# Altium PCB receiver_car_2S_A.PcbDoc
Units mil, origin at the board's own origin, x right, y up, seen from the top; angles counter-clockwise.
Board outline 1675 x 1230 mil, 2 copper layers (Top Layer, Bottom Layer); 48 components, 48 nets, 199 pads, 61 vias.
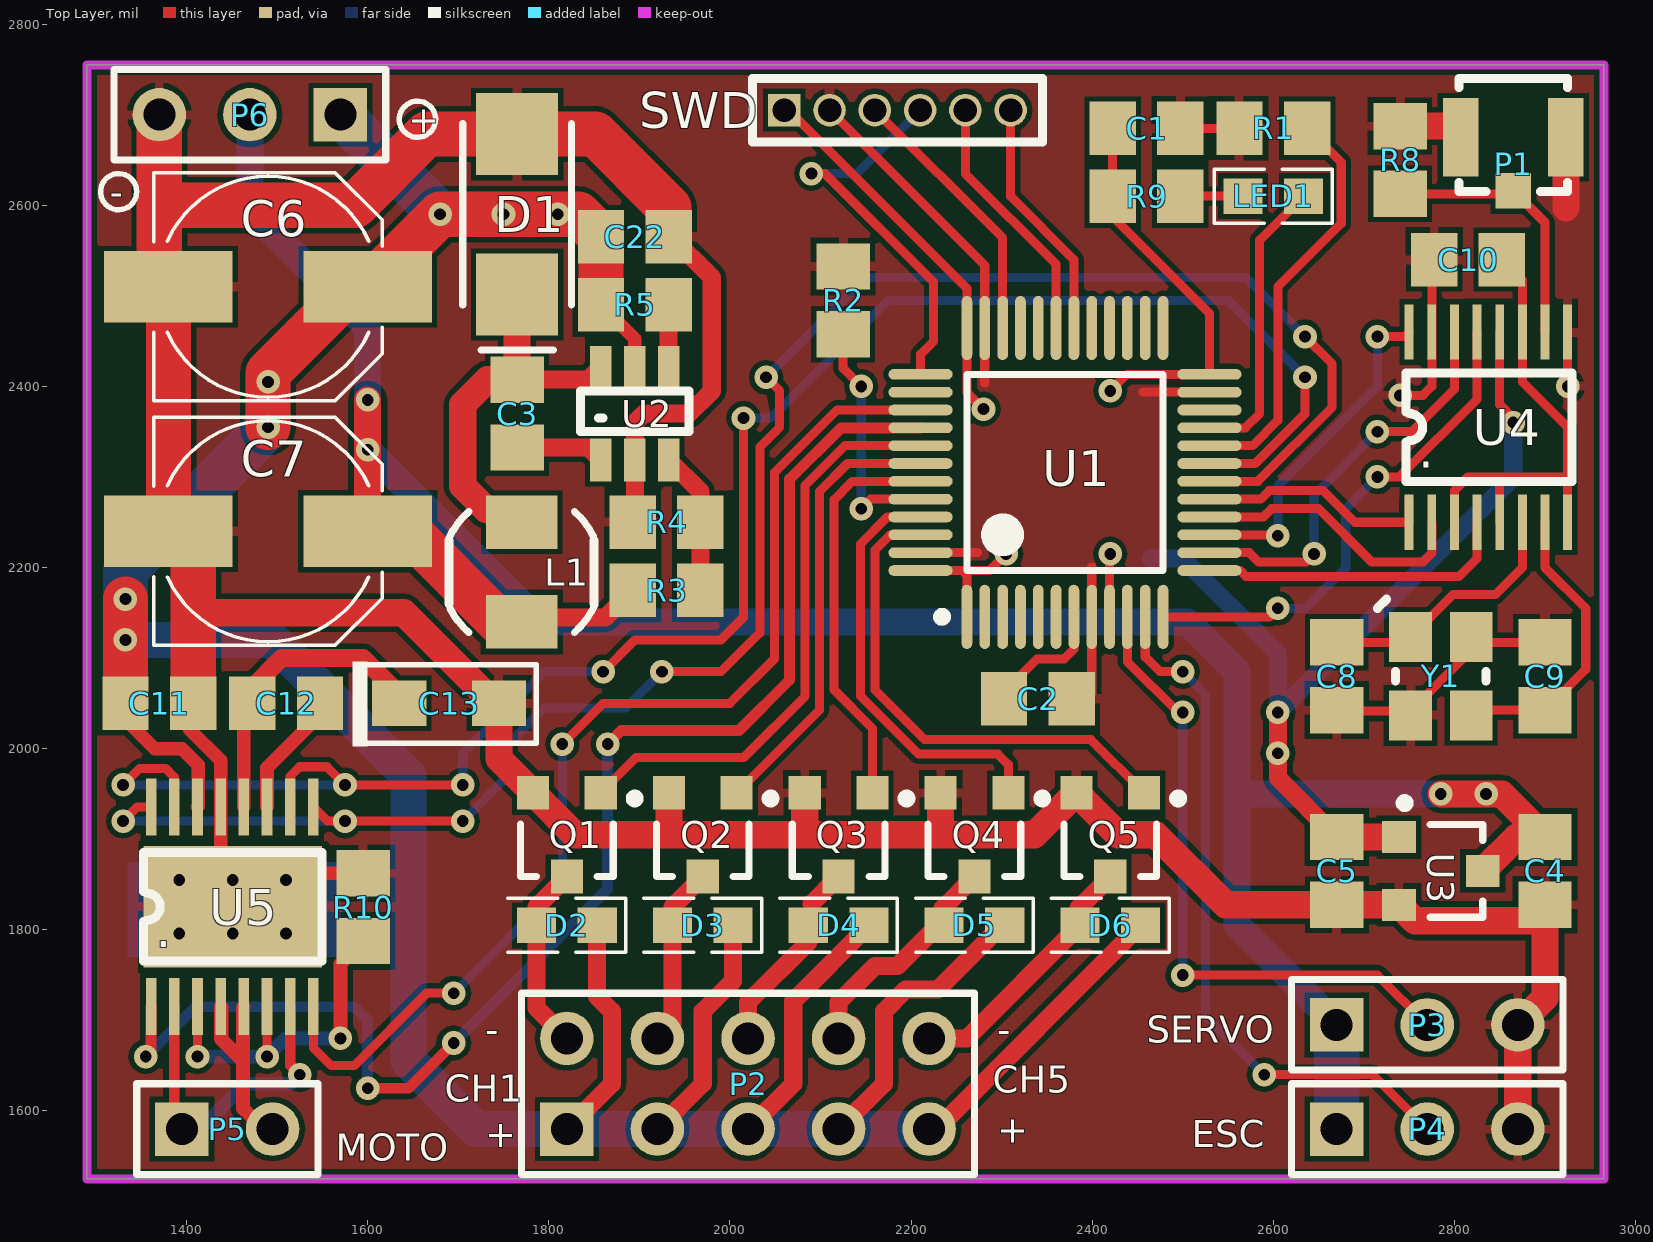
[diagram p0: Top Layer view]
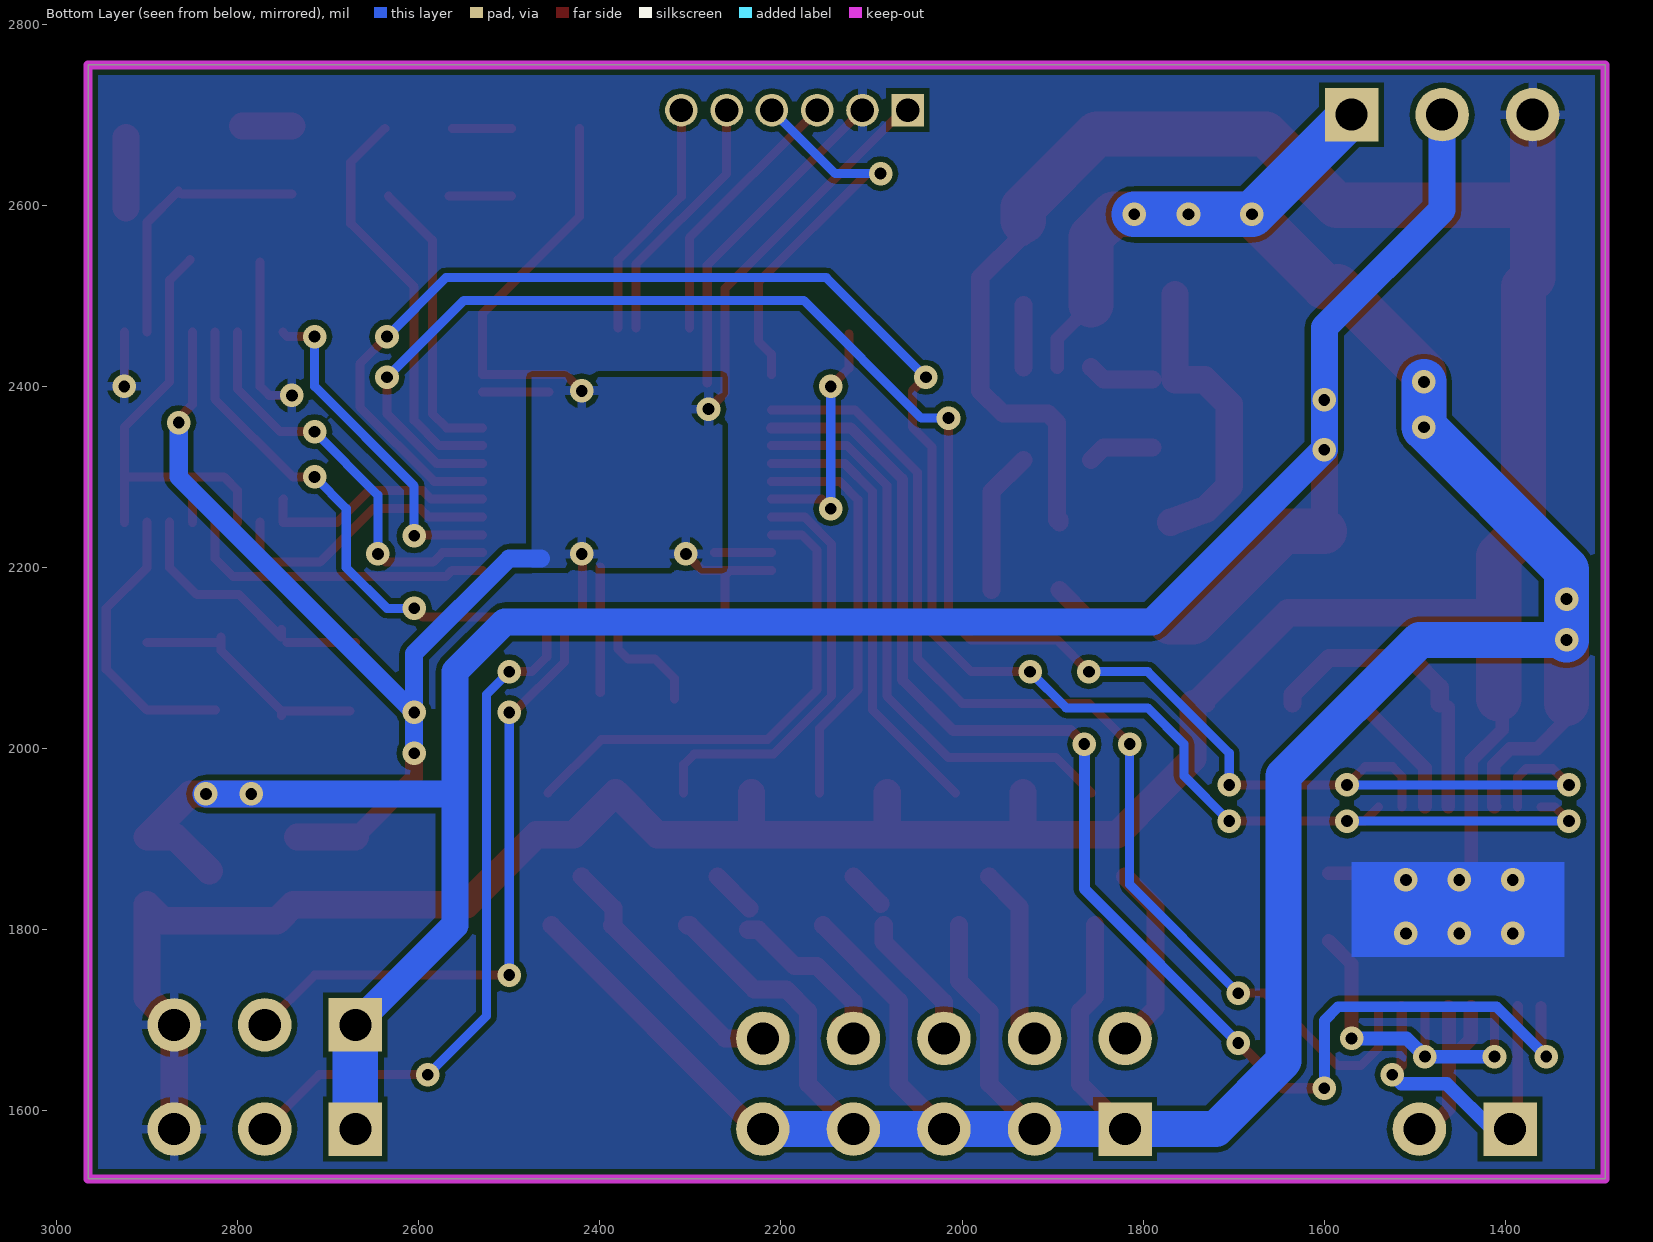
[diagram p1: Bottom Layer view, seen from below]

## Layer stack, top to bottom
Top Layer: signal copper 1.4
Dielectric: dielectric 12.6, FR-4, Dk 4.8
Bottom Layer: signal copper 1.4

## Board outline
1290,2755 2965,2755 2965,1525 1290,1525

## Design rules (kind name [scope] priority, off if disabled: settings)
Clearance [All] p1: gap=6
ComponentClearance [All] p1: gap=6 collisioncheckmode=3 verticalgap=10 showdistances=FALSE
PolygonConnect [All] p1: connectstyle=Relief reliefconductorwidth=10 reliefentries=4 polygonreliefangle="90 Angle"
RoutingVias [All] p1: holewidth=28 width=50 viastyle="Through Hole" minholewidth=28 minwidth=50 maxholewidth=28 maxwidth=50
SilkscreenOverComponentPads [All] p1: minsilkscreentomaskgap=10
SolderMaskExpansion [All] p1: expansion=4
Width [All] p1: maxlimit=50 minlimit=6 preferedwidth=10 minimp=50.000000 maximp=50.000000 favimp=50.000000
26 further rules are at their usual default settings.

## Components (designator, comment, footprint, x,y, rotation, side; value= is the part's Value field where it differs from the comment)
C1 "106" 0805-2 2460,2685 r180 top
C2 "Cap" 0805-2 2340,2055 r0 top
C3 "103" 0805-2 1765,2370 r90 top
C4 "Cap" 0805-2 2900,1865 r270 top
C5 "Cap" 0805-2 2670,1865 r270 top
C6 "Cap Pol" C-RB-S6 1490,2510 r180 top
C7 "Cap Pol" C-RB-S6 1490,2240 r180 top
C8 "Cap" 0805-2 2670,2080 r90 top
C9 "Cap" 0805-2 2900,2080 r270 top
C10 "Cap" 0805-2 2815,2540 r0 top
C11 "Cap" 0805-2 1370,2050 r180 top
C12 "Cap" 0805-2 1510,2050 r0 top
C13 "Cap Pol" CAP-3216 1690,2050 r0 top
C22 "104" 0805-2 1895,2565 r180 top
D1 "D-Schottky" DIODE-SMA 1765,2590 r270 top
D2 "Diode" SOD523 1820,1805 r0 top
D3 "Diode" SOD523 1970,1805 r0 top
D4 "Diode" SOD523 2120,1805 r0 top
D5 "Diode" SOD523 2270,1805 r0 top
D6 "Diode" SOD523 2420,1805 r0 top
L1 "Inductor" l-SMD-4 1770,2195 r270 top
LED1 "red" 0603-1 2600,2610 r0 top
P1 "IPEX" U.FL-R-SMT 2865,2675 r0 top
P2 "Header 5X2" HDR5X2_A1 1820,1580 r0 top
P3 "SERVO" HDR3X1_A 2670,1695 r0 top
P4 "ESC" HDR3X1_A 2670,1580 r0 top
P5 "Header 2" HDR2X1_A 1395,1580 r0 top
P6 "Batter" HDR3X1_A 1570,2700 r180 top
Q1 "AO3400" SOT-23-3L 1820,1905 r180 top
Q2 "AO3400" SOT-23-3L 1970,1905 r180 top
Q3 "AO3400" SOT-23-3L 2120,1905 r180 top
Q4 "AO3400" SOT-23-3L 2270,1905 r180 top
Q5 "AO3400" SOT-23-3L 2420,1905 r180 top
R1 "Res1" 0805-2 2600,2685 r180 top
R2 "Res1" 0805-2 2125,2495 r270 top
R3 "Res1" 0805-2 1930,2175 r0 top
R4 "Res1" 0805-2 1930,2250 r180 top
R5 "Res1" 0805-2 1895,2490 r0 top
R8 "Res1" 0805-2 2740,2650 r270 top
R9 "Res1" 0805-2 2460,2610 r180 top
R10 "Res1" 0805-2 1595,1825 r90 top
SWD "Header 6" HDR6*1*1.27 2185,2705 r0 top
U1 "STM32F103C8T6" STM-LQFP48_N 2370,2305 r90 top
U2 "MP2359" TSOT23-6 1895,2370 r0 top
U3 "662K" SOT-23 2785,1865 r270 top
U4 "LT8920" "SSOP-16 LT8920" 2840,2355 r0 top
U5 "DRV8833PWP" "HTSSOP-16 DRV8833" 1450.94,1825.47 r0 top
Y1 "12M" XTAL_3225 2785,2080 r270 top

## Footprints (in the part's own frame and the unit in brackets; to place one, negate y for a bottom-side part, rotate by r counter-clockwise, add the part's x,y. Pads: shape width x height; smd on the part's side, far side on the other; paste and mask are expansions set on the pad)
0603-1 [mm] "贴?"
  rect 1.1x1 smd: 1(-0.85,0) 2(0.85,0)
  silkscreen extent -1.65,-0.76 1.65,0.76, body extent -1.14,-0.38 1.14,0.38, height 1
0805-2 [mm] "贴?"
  rect 1.3x1.5 smd: 1(-0.95,0) 2(0.95,0)
C-RB-S6 [mm]
  rect 3.6x2 smd: 1(-2.794,0) 2(2.794,0)
  silkscreen extent -3.2,-3.2 3.2,3.2
CAP-3216 [mil]
  rect 60x50 smd: 1(-55,0) 2(55,0)
  silkscreen extent -107,-48 96,46
DIODE-SMA [mm]
  rect 2.3x2.3 smd: 1(-2.25,0) 2(2.25,0)
  silkscreen extent -2.54,-1.52 3.81,1.52, body extent -2.92,-1.4 2.92,1.4, height 3
HDR2X1_A [mm] "Connector; Heade"
  rect 1.5x1.5 hole 0.9: 1(0,0)
  round 1.5 hole 0.9: 2(2.54,0)
  silkscreen extent -1.27,-1.27 3.81,1.27
HDR3X1_A [mm] "Connector; Heade"
  rect 1.5x1.5 hole 0.9: 1(0,0)
  round 1.5 hole 0.9: 2(2.54,0) 3(5.08,0)
  silkscreen extent -1.27,-1.27 6.35,1.27
HDR5X2_A1 [mm] "Connector; Header;"
  rect 1.5x1.5 hole 0.9: 1(0,0)
  round 1.5 hole 0.9: 2(0,2.54) 3(2.54,0) 4(2.54,2.54) 5(5.08,0) 6(5.08,2.54) 7(7.62,0) 8(7.62,2.54) 9(10.16,0) 10(10.16,2.54)
  silkscreen extent -1.27,-1.27 11.43,3.81
HDR6*1*1.27 [mil]
  rect 36x36 hole 26: 1(-125,0)
  round 36 hole 26: 2(-75,0) 3(-25,0) 4(25,0) 5(75,0) 6(125,0)
  silkscreen extent -160,-35 160,35
"HTSSOP-16 DRV8833" [mm] "DRV88"
  rect 0.3x1.6 smd: 1(-2.286,-2.8) 2(-1.636,-2.8) 3(-0.986,-2.8) 4(-0.336,-2.8) 5(0.314,-2.8) 6(0.964,-2.8) 7(1.614,-2.8) 8(2.264,-2.8) 9(2.264,2.8) 10(1.614,2.8) 11(0.964,2.8) 12(0.314,2.8) 13(-0.336,2.8) 14(-0.986,2.8) 15(-1.636,2.8) 16(-2.286,2.8)
  rect 5x3.4 smd: 17(0,0)
  silkscreen extent -2.5,-1.52 2.5,1.52
l-SMD-4 [mm] "C"
  rect 1.5x2 smd: 1(-1.397,0) 2(1.397,0)
  silkscreen extent -1.69,-2.04 1.69,2.06
SOD523 [mm] "D1"
  rect 1.1x1 smd: 1(-0.85,0) 2(0.85,0)
  silkscreen extent -1.65,-0.76 1.65,0.76, body extent -1.14,-0.38 1.14,0.38, height 1
SOT-23 [mm]
  rect 0.9x0.95 smd: 1(-0.95,-1.175) 2(0.95,-1.175) 3(0,1.175)
  silkscreen extent -2.03,-1.14 1.3,1.18
SOT-23-3L [mm] "AO3400"
  rect 0.9x0.95 smd: D(0,1.175) G(-0.95,-1.175) S(0.95,-1.175)
  silkscreen extent -2.03,-1.14 1.3,1.18
"SSOP-16 LT8920" [mil]
  rect 9.84x61.02 smd: 1(-90,-105) 2(-65,-105) 3(-40,-105) 4(-15,-105) 5(10,-105) 6(35,-105) 7(60,-105) 8(85,-105) 9(85,105) 10(60,105) 11(35,105) 12(10,105) 13(-15,105) 14(-40,105) 15(-65,105) 16(-90,105)
  silkscreen extent -93,-60 90,60
STM-LQFP48_N [mm] "QFP, 48-Leads, Body 7x7mm, Pitch 0.5mm, IPC Medium Density"
  oval 1.8x0.3 smd: 1(-4.05,2.75) 2(-4.05,2.25) 3(-4.05,1.75) 4(-4.05,1.25) 5(-4.05,0.75) 6(-4.05,0.25) 7(-4.05,-0.25) 8(-4.05,-0.75) 9(-4.05,-1.25) 10(-4.05,-1.75) 11(-4.05,-2.25) 12(-4.05,-2.75) 25(4.05,-2.75) 26(4.05,-2.25) 27(4.05,-1.75) 28(4.05,-1.25) 29(4.05,-0.75) 30(4.05,-0.25) 31(4.05,0.25) 32(4.05,0.75) 33(4.05,1.25) 34(4.05,1.75) 35(4.05,2.25) 36(4.05,2.75)
  oval 0.3x1.8 smd: 13(-2.75,-4.05) 14(-2.25,-4.05) 15(-1.75,-4.05) 16(-1.25,-4.05) 17(-0.75,-4.05) 18(-0.25,-4.05) 19(0.25,-4.05) 20(0.75,-4.05) 21(1.25,-4.05) 22(1.75,-4.05) 23(2.25,-4.05) 24(2.75,-4.05) 37(2.75,4.05) 38(2.25,4.05) 39(1.75,4.05) 40(1.25,4.05) 41(0.75,4.05) 42(0.25,4.05) 43(-0.25,4.05) 44(-0.75,4.05) 45(-1.25,4.05) 46(-1.75,4.05) 47(-2.25,4.05) 48(-2.75,4.05)
  silkscreen extent -4.17,-2.75 2.75,3.57, body extent -3.5,-3.5 3.5,3.5, height 1.6
TSOT23-6 [mm] "MP2359"
  rect 0.6x1.2 smd: 1(-0.95,-1.3) 2(0,-1.3) 3(0.95,-1.3) 4(0.95,1.3) 5(0,1.3) 6(-0.95,1.3)
  silkscreen extent -1.52,-0.51 1.52,0.64
U.FL-R-SMT [mm] "IPEX插?"
  rect 1x1 smd: 1(0,-1.5)
  rect 1x2.2 smd: 2(-1.475,0) 3(1.475,0)
  silkscreen extent -1.52,-1.52 1.52,1.65
XTAL_3225 [mm]
  rect 1.4x1.2 smd: 1(-1.1,-0.85) 2(1.1,-0.85) 3(1.1,0.85) 4(-1.1,0.85)
  silkscreen extent -2.16,-1.78 0.13,1.27

## Part data
C1 C3 C22: library part "Cap Semi", "Capacitor (Semiconductor SIM Model)"
C2 C4 C5 C8 C9 C10 C11 C12: "无?"
C6 C7 C13: "极性"
D1: "Ð¤Ì"
D2 D3 D4 D5 D6: "二极管"
L1: "电感"
LED1: library part LED3, "Typical BLUE SiC LED"
P1: "U.FL-R-SMT"
P2 P5: "接插件"
P3 P4 P6: library part "Header 3", "接插件"
Q1 Q2 Q3 Q4 Q5: library part MOSFET-N, "N-Channel MOSFET"
R1 R2 R3 R4 R5 R9: "ÌùÆ"
R8: "贴?"
R10: "贴片"
SWD: "接?"
U1: "STM32 ARM-based 32-bit MCU with 64 Kbytes Flash, 48-pin LQFP, Industrial Temperature"
U5: "DRV8833_HTSSOP封装"
Y1: library part XTAL-4PIN, "ÌùÆ"

## Via types
v1: diameter 25.98, hole 12.99, Top Layer to Bottom Layer, 53 vias
v2: diameter 25.98, hole 12.99, Top Layer to Bottom Layer, tented top, 6 vias
v3: diameter 25.98, hole 12.99, Top Layer to Bottom Layer, tented both sides, 2 vias

## Nets (pads, with @x,y where several pads share a name; then routed paths per layer and width w, separated by ;. In a path a pad name is that pad's centre, name@x,y a point inside that pad or via, vN(x,y) a via of type N, cw(c..) or ccw(c..) an arc to the next point about the centre after c; other vN are vias at no path point)
3V3: C1.2 C5.1 R9.2 SWD.1 U1.1 U1.9 U1.24 U1.36 U1.48 U3.1 U4.12 | length 2131.7
  Top Layer w10: SWD.1@2065,2705 2261.73,2508.27 U1.36 2261.73,2393.27 v1(2280,2375) ; U1.48 2256.73,2196.73 ; U1.1 2261.73,2191.73 2256.73,2196.73 ; v1(2305,2215) 2286.73,2196.73 2256.73,2196.73 ; U1.9 v1@2419.21,2214.21 ; v1(2420,2395) 2438.27,2413.27 U1.24 2529.45,2480.55 2422.6,2587.4 R9.2 C1.2 ; U4.12 2850,2380 2865,2365 v1(2865,2360)
  Top Layer w20: v1(2605,2040) v1(2605,1995) 2605,1967.4 C5.1
  Top Layer w30: C5.1 U3.1@2733.74,1902.4
  Bottom Layer w20: 2465,2210 2500,2210 2605,2105 v1(2605,2040) ; v1(2605,1995) v1(2605,2040) ; v1(2865,2360) 2865,2300 v1(2605,2040)
  other v1: 2420,2215
5V: C4.1 C7.1 L1.2 P3.1 P4.1 P6.2 R3.1 U3.3 | length 3016.3
  Top Layer w20: L1.2@1770,2145 1862.6,2145 R3.1
  Top Layer w30: C7.1 v1(1600,2330) v1(1600,2385) ; v1(2785,1950) v1(2835,1950) 2852.4,1950 C4.1 2868.66,1902.4 U3.3
  Top Layer w50: C7.1 1645,2240 1745,2140 L1.2
  Bottom Layer w30: P6.2 1470,2595 1600,2465 v1(1600,2385) v1(1600,2330) 1790,2140 2505,2140 2560,2085 2560,1805 P3.1 ; 2565,1950 v1(2785,1950) v1(2835,1950)
  Bottom Layer w50: P4.1 P3.1
ANT: P1.1 R8.2 U4.10 | length 292.1
  Top Layer w10: R8.2 P1.1@2861.65,2612.6 ; P1.1 2900,2580.94 U4.10
BAT+: C6.1 C11.2 C22.2 D2.2 D3.2 D4.2 D5.2 D6.2 P2.1 P2.3 P2.5 P2.7 P2.9 P6.1 R5.1 U2.5 U5.14 | length 4298.9
  Top Layer w15: C11.2@1337.6,2037.4 1332.6,2032.4 1365,2000 1395,2000 1413.03,1981.97 1413.03,1936.61 U5.14 ; R5.1 1895,2452.6 U2.5
  Top Layer w20: P2.1 1870,1630 1870,1710 1853.46,1726.54 D2.2 ; P2.3 1970,1630 1970,1710 2003.46,1743.46 D3.2 ; P2.5 2070,1630 2070,1721.54 D4.2 ; P2.7 2170,1630 2170,1710 2194,1734 2229.5,1734 2300.5,1805 D5.2 ; P2.9 2228.46,1580 D6.2
  Top Layer w50: C11.2 v3(1332.6,2120) v3(1332.6,2165.2) ; v1(1490,2355) v1(1490,2405) 1490,2415 C6.1@1585,2510 ; C6.1 v1(1680,2590) 1832.6,2590 C22.2 R5.1
  Bottom Layer w40: v3(1332.6,2120) 1495,2120 1645,1970 1645,1655 1720,1580 P2.1 P2.3 P2.5 P2.7 P2.9
  Bottom Layer w50: v3(1332.6,2120) v3(1332.6,2165.2) 1332.6,2197.6 v1(1490,2355) v1(1490,2405) ; P6.1 v1(1680,2590) v1(1810,2590)
  other v1: 1750,2590
DO1: D2.1 P2.2 Q1.D | length 219.9
  Top Layer w20: P2.2@1806.54,1680 P2.2 1786.54,1713.46 D2.1 1786.54,1825.28 Q1.D
DO1_G: Q1.G U1.41 | length 648.2
  Top Layer w10: Q1.G 1896.14,1990 2015,1990 2083,2058 2083,2290.63 2126.9,2334.53 U1.41
DO2: D3.1 P2.4 Q2.D | length 199.5
  Top Layer w20: P2.4 1936.54,1696.54 D3.1 1936.54,1825.28 Q2.D
DO2_G: Q2.G U1.42 | length 495
  Top Layer w10: Q2.G 2099,2042.86 2099,2284 2129.84,2314.84 U1.42
DO3: D4.1 P2.6 Q3.D | length 195
  Top Layer w20: P2.6 2020,1720 2086.54,1786.54 D4.1 ; 2090,1828.74 Q3.D
DO3_G: Q3.G U1.43 | length 445.2
  Top Layer w10: Q3.G 2157.4,2022.34 2115,2064.75 2115,2275 2135.16,2295.16 U1.43
DO4: D5.1 P2.8 Q4.D | length 260.4
  Top Layer w20: P2.8@2135,1695 P2.8 2120,1720 2160,1760 2185,1760 2225,1800 D5.1@2236.54,1800 ; D5.1@2235,1823.74 Q4.D
DO4_G: Q4.G U1.45 | length 472.5
  Top Layer w10: U1.45 2173.86,2255.79 2144,2225.93 2144,2058.37 2208.37,1994 2295.8,1994 2307.4,1982.4 Q4.G
DO5: D6.1 P2.10 Q5.D | length 288.1
  Top Layer w20: P2.10 2261.54,1680 D6.1@2385,1803.46 ; D6.1 D6.1@2385,1803.46 ; Q5.D 2385,1823.74 D6.1@2385,1803.46
DO5_G: Q5.G U1.46 | length 556.3
  Top Layer w10: U1.46 2176.8,2236.1 2160,2219.3 2160,2065 2215,2010 2398.66,2010 Q5.G
DRV_IN1: U1.18 U5.9 U5.16 | length 2113.2
  Top Layer w10: v1(1330,1920) 1345.71,1935.71 U5.16 ; U5.9 1555.79,1920 v1(1575,1920) v1(1705,1920) ; v1(1925,2085) 1990,2085 2033,2128 2033,2333 2055,2355 2055,2395 v1(2040,2410) ; U1.18 2583.04,2295.16 2665,2377.12 2665,2425 v1(2635,2455)
  Bottom Layer w10: v1(1330,1920) v1(1575,1920) ; v1(1705,1920) 1755,1970 1755,2005 1795,2045 1885,2045 v1(1925,2085) ; v1(2040,2410) 2150,2520 2570,2520 v1(2635,2455)
DRV_IN2: U1.19 U5.10 U5.15 | length 2087.5
  Top Layer w10: v1(1330,1960) 1348.2,1978.2 1376.8,1978.2 1386.54,1968.46 U5.15 ; U5.10 1514.49,1969.49 1525,1980 1555,1980 v1(1575,1960) v1(1705,1960) ; v1(1860,2085) 1895,2120 1990,2120 2015,2145 v1(2015,2365) ; U1.19 2580.1,2314.84 2635,2369.75 v1(2635,2410)
  Bottom Layer w10: v1(1330,1960) v1(1575,1960) ; v1(1705,1960) 1705,1995 1795,2085 v1(1860,2085) ; v1(2015,2365) 2045,2365 2175,2495 2550,2495 v1(2635,2410)
DRV_NFAULT: U1.39 U5.8 | length 1235.2
  Top Layer w10: U5.8 1540.08,1669.92 1560,1650 1585,1650 1665,1730 v1(1695,1730) ; v1(1815,2005) 1860,2050 2000,2050 2049,2099 2049,2304.71 2118.19,2373.9 U1.39
  Bottom Layer w10: v1(1695,1730) 1815,1850 v1(1815,2005)
DRV_NSLEEP: U1.40 U5.1 | length 1542.9
  Top Layer w12: v1(1355,1660) 1360.94,1665.94 U5.1 ; v1(1600,1625) 1645,1625 v1(1695,1675) ; v1(1865,2005) 1880,2020 2010,2020 2066,2076 2066,2297.67 2122.54,2354.21 U1.40
  Bottom Layer w12: v1(1355,1660) 1410,1715 1585,1715 1600,1700 v1(1600,1625) ; v1(1695,1675) 1865,1845 v1(1865,2005)
DRV_OUT1: P5.1 U5.2 U5.7 | length 373.2
  Top Layer w12: U5.2 1386.54,1588.46 P5.1 ; U5.7 1514.49,1650.51 v1(1525,1640)
  Bottom Layer w15: P5.1 1415,1580 1465,1630 1515,1630 v1(1525,1640)
DRV_OUT2: P5.2 U5.4 U5.5 | length 266.4
  Top Layer w15: U5.5 1462.41,1714.33 1462.41,1655 ; P5.2@1495,1570 1472.5,1592.5 1462.41,1602.59 1462.41,1655 ; 1438.62,1678.79 1462.41,1655 ; 1438.62,1678.79 1437.72,1679.69 U5.4 1438.62,1714.33 1438.62,1678.79
GND: C1.1 C2.2 C4.2 C5.2 C6.2 C7.2 C8.1 C9.1 C10.1 C11.1 C13.2 C22.1 D1.1 P1.2 P1.3 P3.3 P4.3 P6.3 Q1.S Q2.S Q3.S Q4.S Q5.S R1.2 R2.1 R4.2 R8.1 R10.2 SWD.2 U1.8 U1.23 U1.35 U1.47 U2.2 U3.2 U4.9 U4.15 U5.13 U5.17 Y1.2 Y1.4 | length 5515.4
  Top Layer w10: SWD.2 2281.42,2533.58 U1.35 2281.42,2403.58 ; U1.47 2273.58,2216.42 ; C2.2@2399.53,2062.13 U1.8 2399.53,2200.47 ; 2456.42,2393.58 U1.23 ; C1.1 R1.2 ; C8.1@2675.91,2041.69 Y1.2@2751.54,2041.69 ; v1(2740,2390) 2765,2390 2775,2400 U4.15 C10.1@2775,2537.4 ; Y1.2 Y1.2@2751.54,2041.69 ; Y1.4 2818.46,2108.62 Y1.2@2751.54,2041.69 ; Y1.4@2824.37,2117.4 C9.1 ; v1(2925,2400) U4.9
  Top Layer w15: C11.1@1407.4,2055 1403.7,2051.3 1403.7,2021 1437.72,1986.98 U5.17@1437.72,1838.7 ; U5.17@1487.87,1862.4 R10.2
  Top Layer w20: C13.2@1730,2050 C13.2 ; R4.2 R4.2@1892.6,2252.94 ; R4.2@1895,2252.4 U2.2 1895,2360 1905,2370 1955,2370 1980,2395 1980,2520.15 1935.15,2565 C22.1 C22.1@1932.4,2582.6
  Top Layer w30: 1407.4,2150 1640,2150 C13.2@1735,2055 ; C13.2 1745,1988.86 Q1.S 1828.86,1905 2082.6,1905 ; 1932.6,1907.6 Q2.S ; Q3.S 2082.6,1905 ; 2232.6,1907.4 Q4.S ; U3.2@2733.74,1827.6 C5.2 2547.4,1827.6 2470,1905 2428.86,1905 Q5.S 2336.34,1905 2082.6,1905 ; U3.2 2756.34,1810 2882.4,1810 C4.2 2900,1725 P3.3 P4.3 ; R8.1 P1.2@2794.53,2687.4 ; 2923.07,2596.93 P1.3
  Top Layer w50: P6.3 1370,2600 ; C11.1@1407.4,2055 1407.4,2150 1407.4,2212.6 C7.2 C6.2 1370,2520 1370,2600 ; C22.1@1932.4,2582.6 1932.4,2597.6 1851.42,2678.58 D1.1 1665,2678.58 1586.42,2600 1370,2600
  other v2: 1391.89,1795.94 1450.94,1795.94 1510,1795.94 1391.89,1855 1450.94,1855 1510,1855
LED1: LED1.2 U1.21 | length 322.2
  Top Layer w10: U1.21 2569.21,2354.21 2585,2370 2585,2561.54 LED1.2
LT8920_CS: U1.14 U4.14 | length 455.1
  Top Layer w10: U1.14 2573.58,2216.42 2584,2206 2636,2206 v1(2645,2215) ; v1(2715,2350) 2753,2350 2800,2397 U4.14
  Bottom Layer w10: v1(2645,2215) 2645,2280 v1(2715,2350)
LT8920_PKT: U1.12 U4.13 | length 558.4
  Top Layer w10: U1.12 2595.55,2145.55 v1(2605,2155) ; v1(2715,2300) 2739,2300 2825,2386 U4.13
  Bottom Layer w10: v1(2605,2155) 2635,2155 2680,2200 2680,2265 v1(2715,2300)
LT8920_RST: U1.13 U4.4 | length 346.6
  Top Layer w10: U1.13 2563.27,2196.73 2570,2190 2805,2190 2825,2210 U4.4
NetC3_1: C3.1 U2.1 | length 73.3
  Top Layer w20: C3.1@1790,2332.6 1843.82,2332.6 U2.1
NetC3_2: C3.2 D1.2 L1.1 U2.6 | length 404.2
  Top Layer w20: C3.2@1790,2407.4 1843.82,2407.4 U2.6
  Top Layer w30: C3.2@1762.4,2407.4 1732.4,2407.4 1705,2380 1705,2290 1730.62,2264.38 L1.1 ; C3.2 D1.2
NetC8_2: C8.2 U4.6 Y1.1 | length 289.1
  Top Layer w10: C8.2 Y1.1@2745.63,2117.4 ; Y1.1@2751.54,2131.54 Y1.1 2798.23,2170 2845,2170 2875,2200 U4.6
NetC9_2: C9.2 U4.7 Y1.3 | length 320.3
  Top Layer w10: Y1.3@2824.37,2042.6 C9.2 2945,2087.6 2945,2155 2900,2200 U4.7
NetC10_2: C10.2 U4.3 U4.5 U4.8 U4.11 | length 536.3
  Top Layer w10: U4.3 2800,2285 2815,2300 2850,2300 ; U4.5 2850,2300 ; C10.2 2875,2517.4 U4.11 2875,2405 2925,2355 2925,2300 ; U4.8 2925,2300 ; 2850,2300 2925,2300
NetC12_1: C12.1 C13.1 U5.12 | length 330
  Top Layer w15: U5.12 C12.1@1463.31,2045.71
  Top Layer w20: C12.1 1472.6,2067.6 1505,2100 1595,2100 1635,2060 C13.1
NetC12_2: C12.2 U5.11 | length 125.9
  Top Layer w15: U5.11 1488.9,1978.9 C12.2@1547.4,2037.4
NetLED1_1: LED1.1 R9.1 | length 69.1
  Top Layer w10: R9.1 LED1.1
NetR1_1: R1.1 U1.20 | length 454.3
  Top Layer w10: U1.20 2577.16,2334.53 2605,2362.37 2605,2510 2675,2580 2675,2647.4 R1.1
NetR2_2: R2.2 U1.44 | length 270.8
  Top Layer w10: R2.2 2125,2420 v1(2145,2400) ; v1(2145,2265) 2155.47,2275.47 U1.44
  Bottom Layer w10: v1(2145,2265) v1(2145,2400)
NetR3_2: R3.2 R4.1 U2.3 | length 158.3
  Top Layer w20: U2.3 1967.4,2283.82 R4.1 R3.2
NetR5_2: R5.2 U2.4 | length 68.8
  Top Layer w20: U2.4 R5.2
NetR10_1: R10.1 U5.3 U5.6 | length 394.6
  Top Layer w10: v1(1412.13,1660) U5.3 ; v1(1488.9,1660) U5.6
  Top Layer w15: v1(1570,1680) 1570,1762.6 R10.1
  Bottom Layer w15: v1(1412.13,1660) v1(1488.9,1660) 1508.9,1680 v1(1570,1680)
NRST: C2.1 U1.7 | length 133.9
  Top Layer w10: C2.1@2317.6,2055 2317.6,2077.6 2339.12,2099.12 2369.12,2099.12 2379.84,2109.84 U1.7
SERVO1: P3.2 U1.10 | length 716.6
  Top Layer w10: U1.10 2438.9,2096.1 2495,2040 v1(2500,2040) ; v1(2500,1750) 2715,1750 P3.2
  Bottom Layer w10: v1(2500,1750) v1(2500,2040)
SERVO2: P4.2 U1.11 | length 779.5
  Top Layer w10: U1.11 2458.58,2101.42 2475,2085 v1(2500,2085) ; v1(2590,1640) 2710,1640 P4.2
  Bottom Layer w10: v1(2500,2085) 2525,2060 2525,1705 v1(2590,1640)
SPI_CLK: U1.15 U4.16 | length 377.1
  Top Layer w10: U1.15 v1@2603.9,2236.1 ; v1(2715,2455) 2745,2455 U4.16
  Bottom Layer w10: v1(2605,2235) 2605,2290 2715,2400 v1(2715,2455)
SPI_MISO: U1.16 U4.2 | length 311.9
  Top Layer w10: U1.16 2588.92,2255.79 2598.14,2265 2650,2265 2709,2206 2765,2206 2775,2216 U4.2
SPI_MOSI: U1.17 U4.1 | length 264.7
  Top Layer w10: U1.17 2585.98,2275.47 2595.51,2285 2655,2285 2690,2250 U4.1 2750,2275 U4.1@2749.53,2275.47
SWCLK: SWD.4 U1.37 | length 441.4
  Top Layer w10: v1(2090,2635) 2105,2635 2225,2515 2225,2450 2210.55,2435.55 U1.37
  Bottom Layer w10: v1(2090,2635) 2140,2635 SWD.4
SWDIO: SWD.3 U1.34 | length 299
  Top Layer w10: SWD.3 2301.1,2563.9 U1.34
USART1_RX: SWD.5 U1.31 | length 282
  Top Layer w10: SWD.5 2260,2635 2360.16,2534.84 U1.31
USART1_TX: SWD.6 U1.30 | length 269.5
  Top Layer w10: SWD.6 2310,2609.84 2379.84,2540 U1.30
pads on no net: U1.2 U1.3 U1.4 U1.5 U1.6 U1.22 U1.25 U1.26 U1.27 U1.28 U1.29 U1.32 U1.33 U1.38

## Polygon pours and split planes (outlines as drawn)
GND on Top Layer "Top Layer-No Net" (solid, remove dead copper, pour order 11): 1290,2755 2965,2755 2965,1525 1290,1525
GND on Top Layer "Top Layer-No Net" (solid, pour order 5): 2475,2200 2265,2200 2265,2410 2471.18,2410 2475,2406.18
GND on Bottom Layer "Top Layer-No Net" (solid, pour order 13): 1290,2755 2965,2755 2965,1525 1290,1525
3V3 on Bottom Layer "Top Layer-No Net" (solid, pour order 7): 2475,2200 2265,2200 2265,2410 2475,2410

## Keep-outs
Keep-Out Layer:
  the board outline again, w10

## Other copper
Top Layer:
  pour cut-out: 2805,2740 2805,2615 2925,2615 2925,2740
Bottom Layer:
  rectangle net GND: 1335,1770 1570,1875

## Silkscreen, mask and mechanical layers (free items; w line width, h text height)
Top Overlay:
  circle w6: c1325,2615 r20
  circle w6: c1655,2695 r20
  text "+" at 1645,2680 h30
  text "-" at 1315,2600 h30
  text "-" at 1730,1675 h30
  text "-" at 2295,1675 h30
  text "CH5" at 2290,1620 h30
  text "CH1" at 1685,1610 h30
  text "+" at 2295,1565 h30
  text "+" at 1730,1560 h30
  text "MOTO" at 1565,1545 h30